# EAGLE board DigitalClockSegment_Separator (EAGLE 9.6.1)
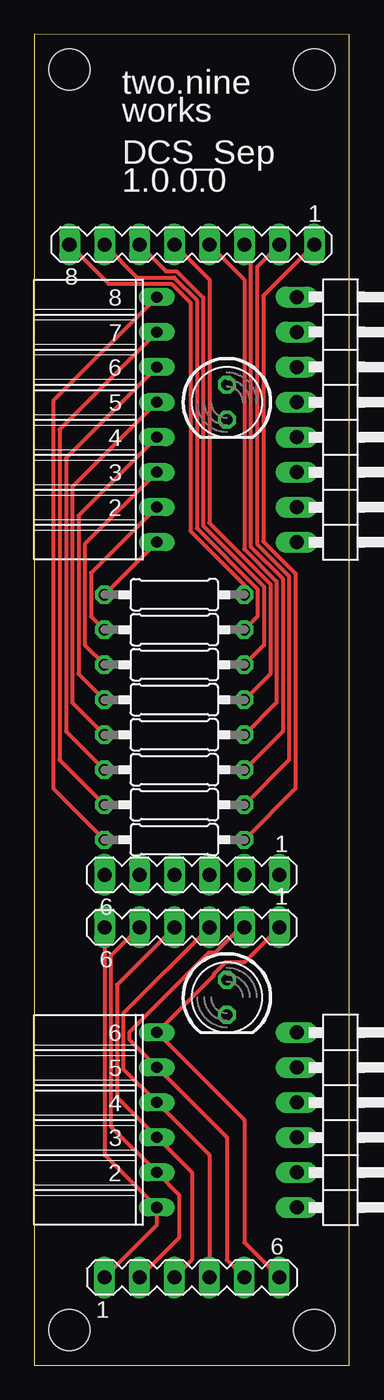
[diagram p0: board, top side]
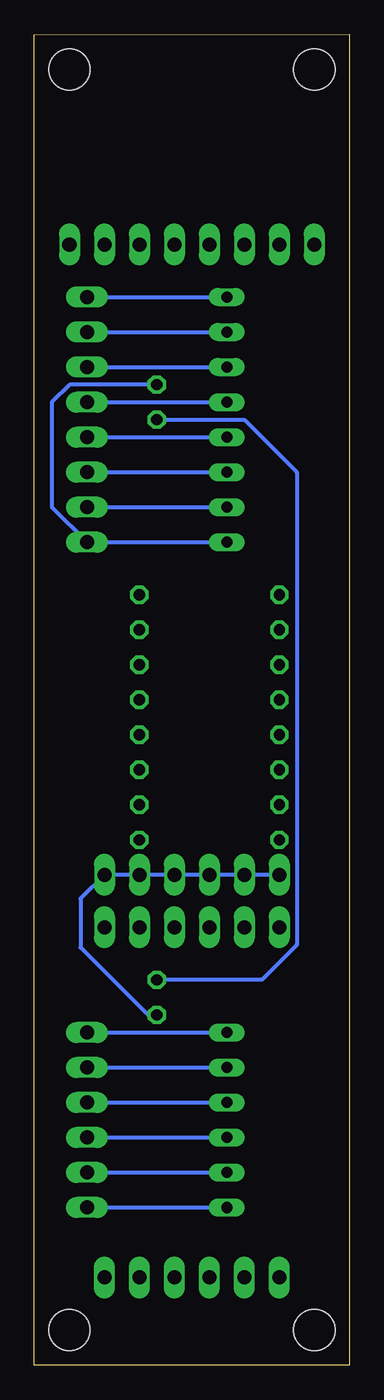
[diagram p1: board, bottom side, seen from below]

Size 22.86 x 96.52 mm. Coordinates in mm from the lower left corner, seen from the top.
Outline: 0,0 22.86,0 22.86,96.51 0,96.52 0,0
Copper layers (1*16): Top 0.035mm / dielectric 1.5mm / Bottom 0.035mm
Design rules "SeeedStudio_2layer_DRU_no_angle_20140221": minimum track width 6mil, minimum drill 12mil, track to track 6mil, track to pad 6mil, pad to pad 6mil, via to via 6mil, smd to smd 0mil, copper to edge 10mil, drill to drill 10mil, minimum pad ring 10mil, minimum via ring 6mil, stop-mask expansion 2mil, vias tented up to drill 100mil, thermal gap 10mil
Holes 3 mm at 2.54,93.98 20.32,93.98 2.54,2.54 20.32,2.54

## Footprints (pad centres in the part's own frame; a part is rotated, then mirrored left to right if it is on the bottom)
1X06/90 = drill 1.016 long: 1 -6.35,-3.81; 2 -3.81,-3.81; 3 -1.27,-3.81; 4 1.27,-3.81; 5 3.81,-3.81; 6 6.35,-3.81
1X08/90 = drill 1.016 long: 1 -8.89,-3.81; 2 -6.35,-3.81; 3 -3.81,-3.81; 4 -1.27,-3.81; 5 1.27,-3.81; 6 3.81,-3.81; 7 6.35,-3.81; 8 8.89,-3.81
LED5MM = drill 0.813 octagon: A -1.27,0; K 1.27,0
0207/10 = drill 0.813 octagon: 1 -5.08,0; 2 5.08,0
FE08W = drill 0.813 long: 1 -8.89,0; 2 -6.35,0; 3 -3.81,0; 4 -1.27,0; 5 1.27,0; 6 3.81,0; 7 6.35,0; 8 8.89,0
FE06W = drill 0.813 long: 1 -6.35,0; 2 -3.81,0; 3 -1.27,0; 4 1.27,0; 5 3.81,0; 6 6.35,0
MA06-1 = drill 1.016 long: 1 -6.35,0; 2 -3.81,0; 3 -1.27,0; 4 1.27,0; 5 3.81,0; 6 6.35,0
MA08-1 = drill 1.016 long: 1 -8.89,0; 2 -6.35,0; 3 -3.81,0; 4 -1.27,0; 5 1.27,0; 6 3.81,0; 7 6.35,0; 8 8.89,0

## Placement (x,y rotation side)
JP1  [1X06/90]  22.86,17.78 270 top
JP2  [1X08/90]  22.86,68.58 270 top
LED1  [LED5MM]  13.97,69.85 270 top
LED2  [LED5MM]  13.97,26.67 270 top
R1  320  [0207/10]  10.16,55.88 180 top
R2  40  [0207/10]  10.16,53.34 180 top
R3  40  [0207/10]  10.16,50.8 180 top
R4  40  [0207/10]  10.16,48.26 180 top
R5  40  [0207/10]  10.16,45.72 180 top
R6  40  [0207/10]  10.16,43.18 180 top
R7  40  [0207/10]  10.16,40.64 180 top
R8  40  [0207/10]  10.16,38.1 180 top
SV1  [FE08W]  8.89,68.58 90 top
SV2  [FE06W]  8.89,17.78 90 top
SV3  [MA06-1]  11.43,35.56 180 top
SV4  [MA06-1]  11.43,31.75 180 top
SV5  [MA06-1]  11.43,6.35 0 top
SV6  [MA08-1]  11.43,81.28 180 top

## Library data of the parts
JP1 JP2 = pinhead
LED1 LED2 = led
R1-R8 = rcl; SPICEPREFIX: R
SV1 SV2 = con-lsta; OC_FARNELL: unknown; OC_NEWARK: unknown
SV3-SV6 = con-lstb; OC_FARNELL: unknown; OC_NEWARK: unknown

## Nets
N$1: JP2.1 R8.2 SV1.8
N$2: JP2.2 R7.2 SV1.7
N$3: JP2.3 R6.2 SV1.6
N$4: JP2.4 R5.2 SV1.5
N$5: JP2.5 R4.2 SV1.4
N$6: JP2.6 R3.2 SV1.3
N$7: JP2.7 R2.2 SV1.2
N$8: JP2.8 LED1.A R1.2 SV1.1
N$9: JP1.1 SV2.6 SV4.1 SV5.6
N$10: JP1.2 SV2.5 SV4.2 SV5.5
N$11: JP1.3 SV2.4 SV4.3 SV5.4
N$12: JP1.4 SV2.3 SV4.4 SV5.3
N$13: JP1.5 SV2.2 SV4.5 SV5.2
N$14: JP1.6 SV2.1 SV4.6 SV5.1
N$15: LED2.K SV3.1 SV3.2 SV3.3 SV3.4 SV3.5 SV3.6
N$16: LED1.K LED2.A
N$17: R1.1 SV6.8
N$18: R2.1 SV6.7
N$19: R3.1 SV6.6
N$20: R4.1 SV6.5
N$21: R5.1 SV6.4
N$22: R6.1 SV6.3
N$23: R7.1 SV6.2
N$24: R8.1 SV6.1

## Tracks (layer width: path | path; a pad name or v marks a point on that pad's centre or on a via)
N$1
  Top 0.305: SV1.8 1.37,69.95 1.37,41.81 R8.2
  Bottom 0.305: JP2.1 SV1.8
N$2
  Top 0.305: SV1.7 1.83,67.87 1.83,43.89 R7.2
  Bottom 0.305: JP2.2 SV1.7
N$3
  Top 0.305: SV1.6 2.29,65.79 2.29,45.97 R6.2
  Bottom 0.305: JP2.3 SV1.6
N$4
  Top 0.305: SV1.5 2.74,63.7 2.74,48.06 R5.2
  Bottom 0.305: JP2.4 SV1.5
N$5
  Top 0.305: SV1.4 3.2,61.62 3.2,50.14 R4.2
  Bottom 0.305: JP2.5 SV1.4
N$6
  Top 0.305: R3.2 3.66,52.22 3.66,59.54 SV1.3
  Bottom 0.305: JP2.6 SV1.3
N$7
  Top 0.305: R2.2 4.12,54.3 4.12,57.45 SV1.2
  Bottom 0.305: JP2.7 SV1.2
N$8
  Top 0.305: SV1.1 R1.2
  Bottom 0.305: SV1.1 JP2.8 21.59,62.23 21.59,69.85 20.32,71.12 LED1.A
N$9
  Top 0.305: SV5.6 15.24,8.89 15.24,17.78 SV2.6 13.01,28.25 13.01,28.34 13.88,29.21 15.24,29.21 SV4.1
  Bottom 0.305: JP1.1 SV2.6
N$10
  Top 0.305: SV5.5 13.97,7.62 13.97,16.51 SV2.5 6.91,23.57 6.91,24.17 12.66,29.92 13.14,29.92 14.97,31.75 SV4.2
  Bottom 0.305: JP1.2 SV2.5
N$11
  Top 0.305: SV5.4 12.7,15.24 SV2.4 6.45,21.49 6.45,25.5 SV4.3
  Bottom 0.305: JP1.3 SV2.4
N$12
  Top 0.305: SV5.3 11.43,7.62 11.43,13.97 SV2.3 5.99,19.41 5.99,27.58 SV4.4
  Bottom 0.305: JP1.4 SV2.3
N$13
  Top 0.305: SV5.2 10.52,9.25 10.52,12.34 SV2.2 5.54,17.32 5.54,29.67 SV4.5
  Bottom 0.305: JP1.5 SV2.2
N$14
  Top 0.305: SV5.1 8.89,10.16 SV2.1 5.08,15.24 SV4.6
  Bottom 0.305: JP1.6 SV2.1
N$15
  Bottom 0.305: SV3.6 SV3.5 SV3.4 SV3.3 SV3.2 SV3.1 19.51,33.83 19.51,30.29 14.62,25.4 LED2.K
N$16
  Bottom 0.305: LED1.K 7.62,68.58 3.81,64.77 3.81,30.48 6.35,27.94 LED2.A
N$17
  Top 0.305: R1.1 15.24,56.6 11.33,60.51 11.33,77.06 9.95,78.44 5.38,78.44 SV6.8
N$18
  Top 0.305: R2.1 16.2,54.3 16.2,56.28 11.79,60.7 11.79,77.25 10.14,78.89 7.47,78.89 SV6.7
N$19
  Top 0.305: R3.1 16.66,52.22 16.66,56.47 12.24,60.89 12.24,77.44 10.33,79.35 9.55,79.35 SV6.6
N$20
  Top 0.305: R4.1 17.12,50.14 17.12,56.66 12.7,61.08 12.7,78.74 SV6.5
N$21
  Top 0.305: R5.1 17.58,48.06 17.58,56.85 15.24,59.19 15.24,78.74 SV6.4
N$22
  Top 0.305: R6.1 18.03,45.97 18.03,57.04 15.7,59.37 15.7,80.82 SV6.3
N$23
  Top 0.305: R7.1 18.49,43.89 18.49,57.23 16.15,59.56 16.15,79.65 SV6.2
N$24
  Top 0.305: R8.1 18.95,41.81 18.95,57.42 16.61,59.75 16.61,77.57 SV6.1

## Text on the board
tNames: two.nine / works | DCS_Sep / 1.0.0.0